# Allegro board 08_037760d.brd
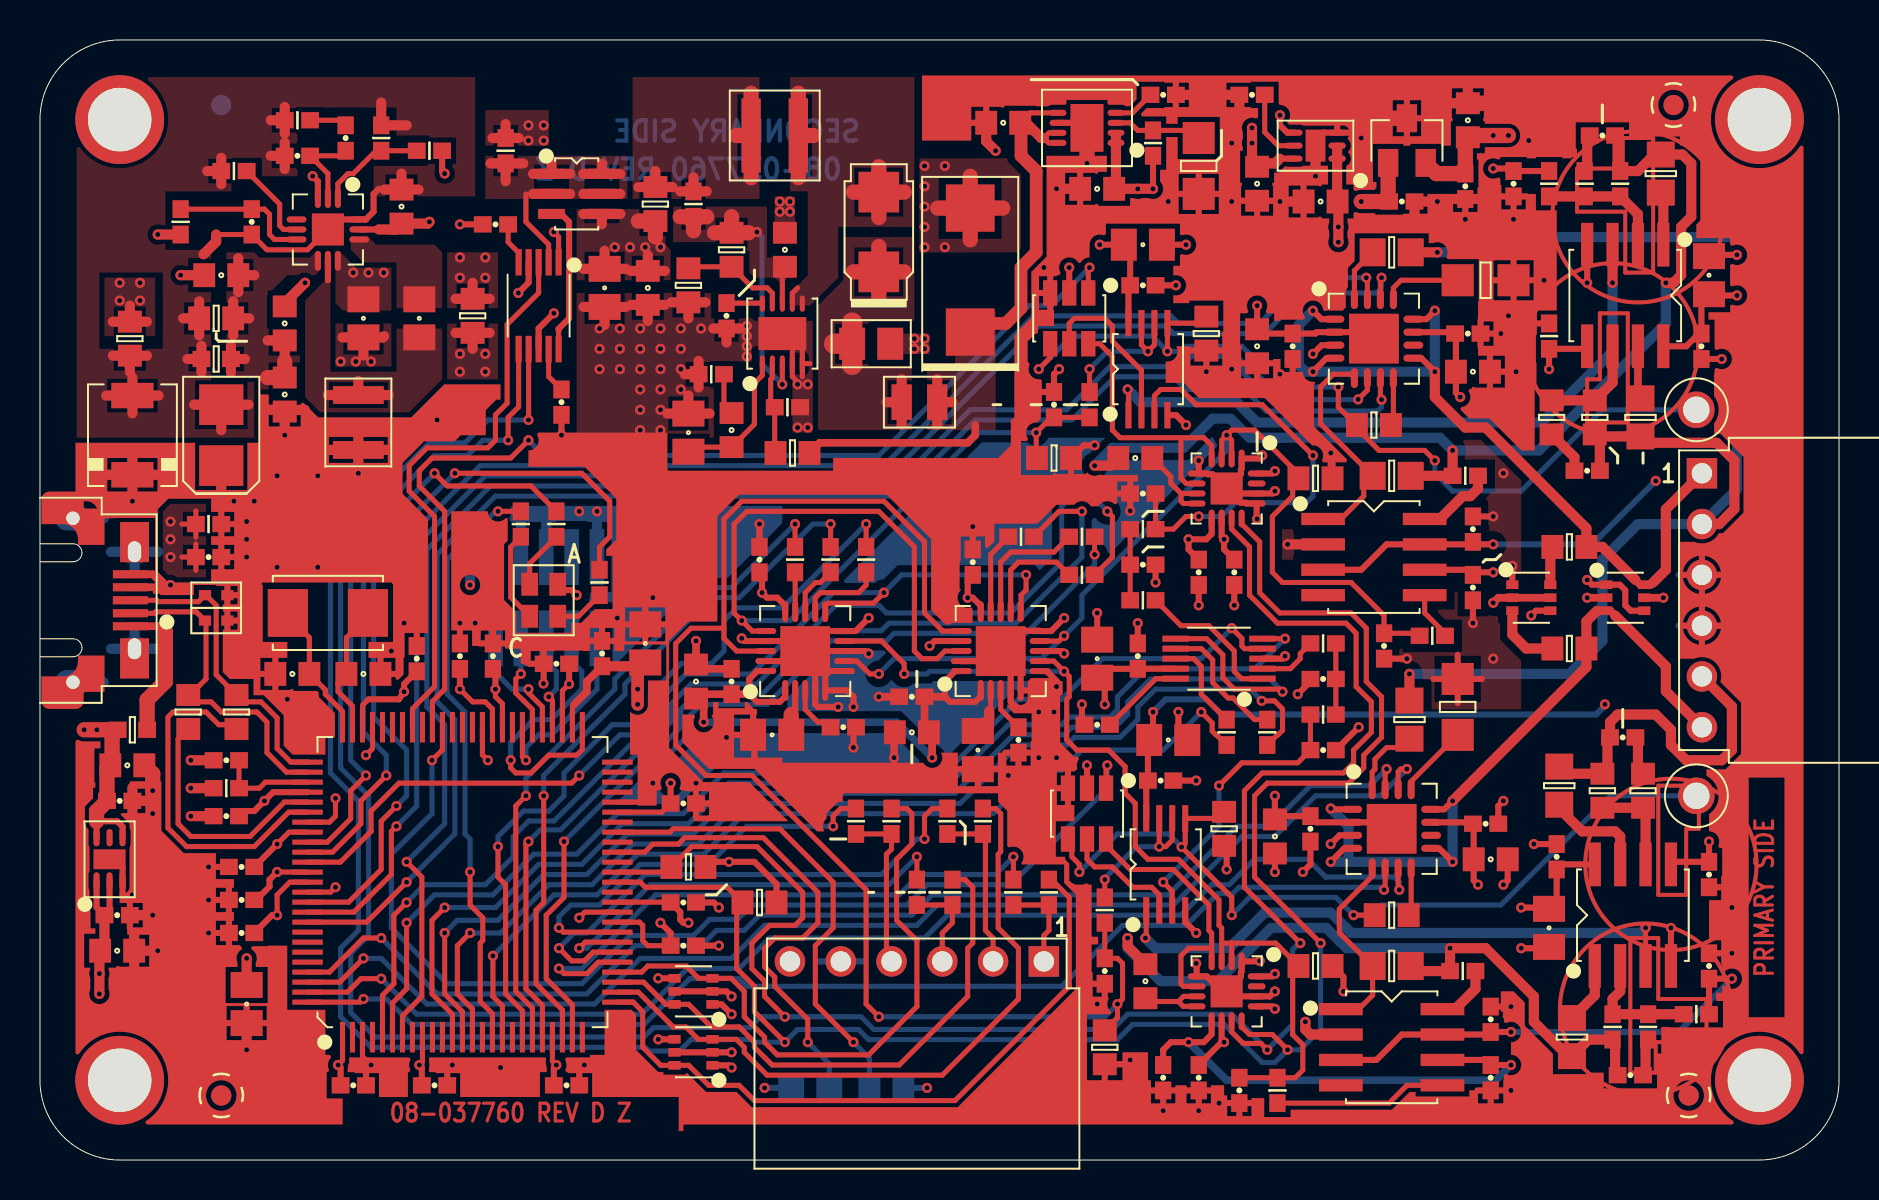
[diagram p0: board, top side]
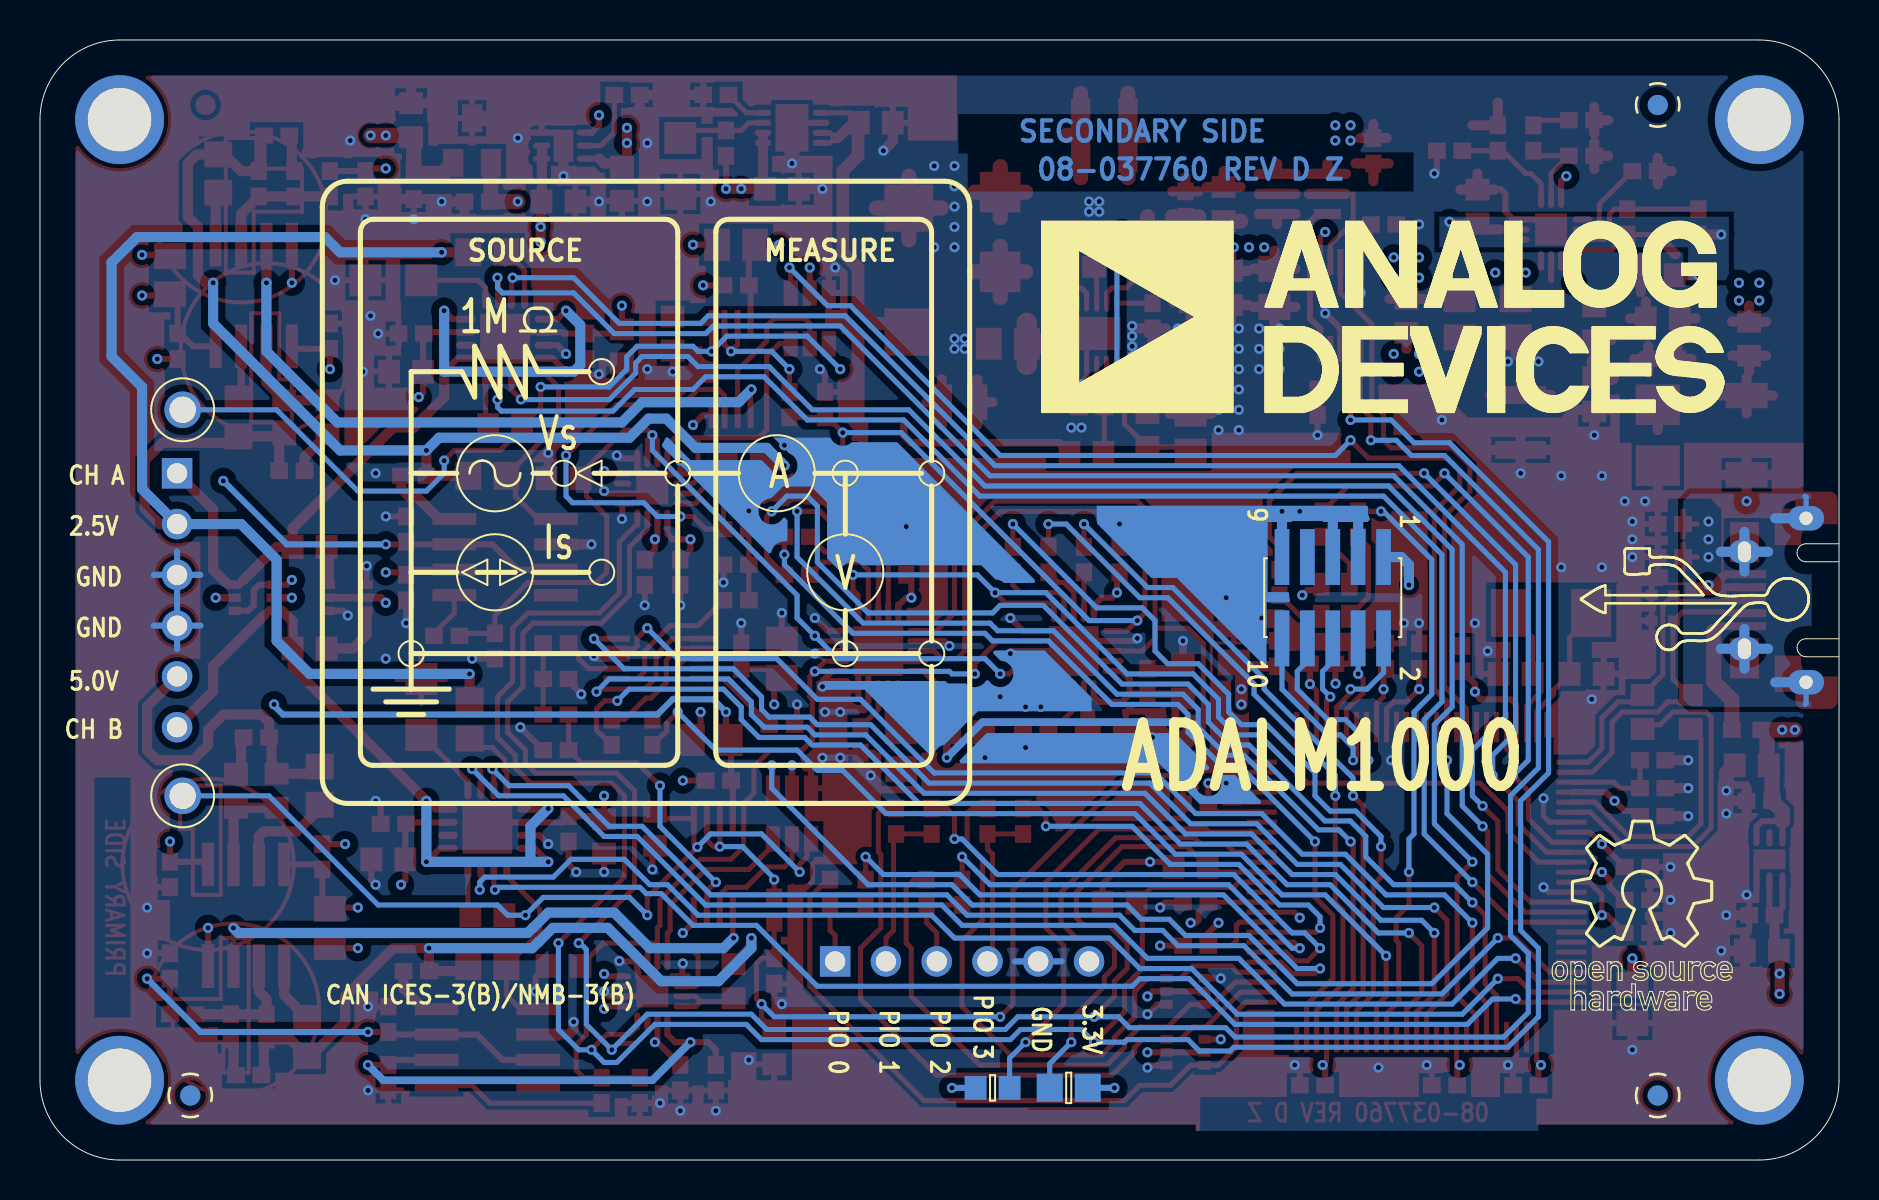
[diagram p1: board, bottom side, seen from below]

Outline 89.99 x 56.01 mm; copper layers: TOP, L2_GND, L3_VDD, BOTTOM. Coordinates in mm from the lower left corner of the outline.
Outline path: 0,52.02 arc(1.17,54.84) 3.99,56.01 86,56.01 arc(88.82,54.84) 89.99,52.02 89.99,3.99 arc(88.82,1.17) 86,0 3.99,0 arc(1.17,1.17) 0,3.99 0,52.02

## Design rules (mm)
net group USB: nets D+ D-
net group USB_A: nets D+_A D-_A
nets with their own width: min track width 0.305; nets 1V8 2V5 3V3 5V0 6V0 -1V0 GND VCC

## Placement (name value [footprint] x y rotation side)
A2  ADG719BRTZ  [SOT23_6]  51.49 42.09 180 top
A3  ADA4661-2ARMZ  [MSOP8]  55.42 39.55 0 top
A4  AD8018ARZ  [SO8]  79.3 43.23 180 top
B2  ADG719BRTZ  [SOT23_6]  52.37 17.32 180 top
B3  ADA4661-2ARMZ  [MSOP8]  56.31 14.78 0 top
B4  AD8018ARZ  [SO8]  79.68 12.24 0 top
C1  10uF  [C0805]  10.34 7.8 270 top
C2  0.1UF  [C0402]  15.67 3.73 180 top
C3  10uF  [C0805]  30.28 25.83 90 top
C4  0.1UF  [C0402]  19.74 3.73 180 top
C5  10pF  [C0402]  9.32 19.99 0 top
C6  12PF  [C0603]  16.18 24.31 0 top
C7  12PF  [C0603]  12.62 24.31 180 top
C8  0.1UF  [C0402]  71.3 48.69 90 top
C9  0.1UF  [C0402]  3.99 17.96 180 top
C10  1UF  [C0603]  71.42 51.99 90 top
C11  100nF  [C0402]  22.78 46.79 0 top
C12  4.7uF  [C0603]  4.37 19.74 0 top
C13  0.1UF  [C0402]  68.12 47.93 180 top
C14  0.1UF  [C0402]  3.86 12.24 180 top
C15  4.7uF  [C0603]  3.86 10.46 0 top
C16  0.01UF  [C0402]  26.09 37.9 90 top
C17  1UF  [C0603]  30.4 43.61 270 top
C18  10uF  [C0805]  28.24 43.61 90 top
C19  0.1UF  [C0402]  26.34 3.73 180 top
C21  0.1UF  [C0402]  46.66 29.9 270 top
C22  1UF  [C0603]  43.61 21.39 180 top
C23  1UF  [C0603]  37.26 45.52 90 top
C24  0.1UF  [C0402]  32.18 10.72 180 top
C25  0.1UF  [C0402]  43.61 23.16 0 top
C26  0.01uF  [C0402]  53.26 9.45 90 top
C27  0.01uF  [C0402]  67.23 25.7 90 top
C28  0.01uF  [C0402]  59.99 3.48 90 top
C30  1uF  [C0805H53]  41.58 40.82 0 top
C32  0.1UF  [C0402]  32.18 12.88 180 top
C33  0.1UF  [C0402]  28.12 25.32 270 top
C34  0.1UF  [C0402]  32.18 17.83 180 top
C35  0.1UF  [C0402]  22.66 25.2 270 top
C36  0.1UF  [C0402]  25.83 24.82 0 top
C37  0.1UF  [C0402]  18.85 25.07 270 top
C38  0.1UF  [C0402]  35.99 30.02 270 top
C39  1000pF  [C0603]  55.3 8.94 90 top
C40  0.1UF  [C0402]  83.49 9.7 270 top
C42  0.01uF  [C0402]  50.72 37.77 270 top
C43  1000pF  [C0603]  54.79 35.1 180 top
C44  0.1UF  [C0402]  73.71 48.82 90 top
C45  220uF  [C7343-31]  46.53 44.5 90 top
C46  0.1UF  [C0402]  71.42 41.33 180 top
C48  0.1UF  [C0402]  21.01 25.2 270 top
C49  0.1UF  [C0402]  71.68 31.55 270 top
C50  0.1UF  [C0402]  10.08 14.66 0 top
C51  0.1UF  [C0402]  9.32 17.2 0 top
C52  0.1UF  [C0402]  10.08 13 0 top
C53  0.1UF  [C0402]  10.08 11.35 0 top
C54  0.1UF  [C0402]  55.17 43.74 180 top
C55  0.1UF  [C0402]  56.18 4.11 270 top
C56  0.1UF  [C0402]  57.96 4.11 90 top
C57  10pF  [C0402]  79.17 21.13 180 top
C58  0.1UF  [C0402]  72.31 16.81 180 top
C59  1UF  [C0603]  32.82 23.93 90 top
C61  0.1UF  [C0402]  34.59 23.93 270 top
C62  1UF  [C0603]  72.57 15.04 0 top
C63  0.1UF  [C0402]  54.91 25.2 270 top
C64  10uF  [C0805]  52.88 25.07 270 top
C65  0.1UF  [C0402]  57.96 29.39 270 top
C66  0.1UF  [C0402]  59.74 29.39 90 top
C67  33pF  [C0402]  78.16 51.23 0 top
C68  1UF  [C0603]  71.68 39.42 0 top
C69  0.1UF  [C0402]  71.68 28.63 270 top
C70  0.1UF  [C0402]  72.57 4.11 270 top
C71  0.1UF  [C0402]  72.57 7.04 270 top
C72  10uF  [C0805]  36.63 21.26 0 top
C73  10uF  [C0805]  46.91 20.5 90 top
C74  0.1UF  [C0402]  40.18 21.64 180 top
C75  0.1UF  [C0402]  48.95 21.01 90 top
C76  10uF  [C0805]  55.17 45.77 0 top
C77  0.1UF  [C0402]  83.11 40.69 90 top
C78  10uF  [C0805]  83.49 44.25 90 top
C79  0.1UF  [C0402]  56.06 18.97 180 top
C80  10uF  [C0805]  56.44 21.01 0 top
C81  0.1UF  [C0402]  75.87 15.16 270 top
C82  10uF  [C0805]  75.49 11.61 270 top
C84  33pF  [C0402]  79.55 4.24 180 top
C85  0.01UF  [C0402]  83.49 14.27 90 top
C90  0.1UF  [C0402]  62.66 40.69 90 top
C91  1UF  [C0603]  60.88 40.69 270 top
C92  0.1UF  [C0402]  63.55 16.56 90 top
C93  1UF  [C0603]  61.77 16.18 270 top
C94  0.01uF  [C0402]  55.17 29.77 180 top
C95  0.01uF  [C0402]  64.19 24.05 0 top
C96  0.01uF  [C0402]  55.17 33.32 0 top
C97  0.01uF  [C0402]  64.19 20.5 180 top
C99  0.1UF  [C0402]  52.88 21.77 0 top
C101  10pF  [C0402]  8.43 30.15 180 top
C102  10pF  [C0402]  77.39 34.47 0 top
C104  4.7uF  [C0603]  48.18 51.87 180 top
C105  0.01UF  [C0402]  56.18 53.26 180 top
C106  4.7uF  [C0603]  52.88 48.56 180 top
C107  2.2uF  [C0603]  60.88 48.82 270 top
C108  2.2uF  [C0603]  64.06 47.93 180 top
C109  0.01UF  [C0402]  34.34 42.21 90 top
C110  0.082UF  [C0603]  34.59 36.5 270 top
C111  10PF  [C0805]  32.44 36.37 270 top
C112  0.01UF  [C0402]  60.63 53.26 0 top
CBST  0.01uF  [C0805]  18.97 42.09 270 top
CC  1UF  [C0603]  12.24 41.83 90 top
CC1  2700pF  [C0402]  15.29 51.1 270 top
CC2  22PF  [C0402]  12.88 50.22 0 top
CIN1  10uF  [C0805]  16.18 42.09 270 top
COUT1  4.7uF  [C0603]  12.24 38.28 90 top
COUT2  47uF  [C3528]  9.07 36.25 90 top
CSS  TBD0402  [C0402]  10.59 46.91 90 top
CVCC  1UF  [C0603]  18.08 47.68 90 top
CVCC2  1UF  [C0603]  9.07 44.25 0 top
D1  B160B-13-F  [DIO214AA]  4.62 36.25 90 top
D2  BAT54SDW-7-F  [SOT363H43]  74.6 28.12 270 top
D3  LTST-C19FD1WT  [LEDSML83W63H26]  25.2 27.99 270 top
D4  B240A-E3/61T  [SMA]  41.96 46.41 90 top
D5  BAT54SDW-7-F  [SOT363H43]  32.69 5.38 90 top
D6  BAT54SDW-7-F  [SOT363H43]  32.69 8.43 90 top
D7  BAT54SDW-7-F  [SOT363H43]  79.3 28.12 270 top
D8  TVSA04V05C006  [D0402]  8.81 26.97 180 top
D9  TVSA04V05C006  [D0402]  8.81 28.24 180 top
E1  330OHM  [L0603]  4.62 21.51 0 top
JTAG  FTSH-105-01-L-DV-TR  [CNHDR2X5H245]  25.32 28.12 0 bottom
L1  2.2uH  [LSML126W90H59]  15.93 36.88 270 top
L2  1uH  [L0603]  8.81 40.06 0 top
L3  4.7uH  [LSMSQ157H122]  36.75 51.23 0 top
L4  110nH  [L9075]  43.99 37.9 0 top
NOREF  -  [unnamed]  86.01 3.99 0 top
NOREF#2  -  [unnamed]  3.99 52.03 0 top
NOREF#3  -  [unnamed#2]  81.71 52.76 0 top
NOREF#4  -  [#2]  111.21 31.5 0 top
NOREF#5  -  [unnamed#2]  82.47 3.23 0 top
NOREF#6  -  [#2]  -139.52 -208.1 0 top
NOREF#7  -  [unnamed#2]  9.07 3.23 0 top
NOREF#8  -  [#2]  2.66 35.99 0 top
NOREF#9  -  [#2]  46.54 70.13 0 top
NOREF#10  -  [#2]  -139.52 -208.1 0 top
NOREF#11  -  [#2]  -139.52 -208.1 0 top
NOREF#12  -  [unnamed]  86.01 52.03 0 top
NOREF#13  -  [#2]  -92.76 141.42 0 top
NOREF#14  -  [#2]  -134.19 -59.81 0 top
NOREF#15  -  [#2]  174.8 62.41 0 top
NOREF#16  -  [#2]  2.21 25.45 0 top
NOREF#17  -  [unnamed]  3.99 3.99 0 top
NOREF#18  -  [#2]  0 30.71 0 top
NOREF#19  -  [unnamed#2]  82.47 3.23 180 bottom
NOREF#20  -  [unnamed#2]  9.07 3.23 180 bottom
NOREF#21  -  [unnamed#2]  9.07 52.76 180 bottom
P1  10103592-0001LF  [CNFCI10103592-0001LF]  1.82 27.99 90 top
P2  PPPC061LGBN-RC  [CNHDRRA1X6H108]  83.13 34.34 270 top
P3  PPPC061LGBN-RC  [CNHDRRA1X6H108]  50.22 9.93 180 top
P4  050/LT/B2  [CNOXLEY50-LT-B2]  82.85 37.52 0 top
P5  050/LT/B2  [CNOXLEY50-LT-B2]  82.85 18.21 0 top
Q1  SI3456DDV-T1-GE3  [TSOP6]  26.85 48.31 270 top
R1  10K  [R0603]  35.99 12.88 180 top
R2  10K  [R0603]  32.44 14.66 180 top
R3  6.8K  [R0402]  9.32 18.59 0 top
R4  33  [R0603]  9.83 22.4 90 top
R5  33  [R0603]  7.42 22.4 90 top
R6  0.1  [R0402]  23.29 50.47 270 top
R7  150  [R0402]  53.26 12.5 90 top
R8  1MEG  [R0603]  59.23 16.56 270 top
R9  750  [R0402]  82.85 7.29 180 top
R10  750  [R0402]  78.66 6.65 270 top
R11  0  [R0603]  34.59 45.52 90 top
R12  50K  [R0603]  32.44 43.74 90 top
R13  0  [R0805]  38.53 3.61 0 bottom
R15  150  [R0402]  69.65 26.21 180 top
R16  150  [R0402]  61.9 3.48 90 top
R18  53.6K  [R0603]  37.64 35.36 0 top
R19  12.7K  [R0402]  37.39 37.64 180 top
R20  150  [R0402]  52.5 37.77 90 top
R21  0  [R0402]  7.04 46.91 270 top
R23  49.9  [R1206]  70.92 22.66 90 top
R24  750  [R0402]  75.49 48.82 270 top
R25  750  [R0402]  79.04 48.82 90 top
R26  100  [R0402]  77.27 48.82 90 top
R27  49.9  [R0805]  67.61 45.39 0 top
R28  49.9  [R1206]  72.31 43.99 0 top
R29  100  [R0603]  66.73 36.75 180 top
R30  0.5  [R0805]  67.61 34.21 180 top
R31  100  [R0603]  67.61 12.24 180 top
R32  0.5  [R0805]  67.61 9.7 180 top
R33  24.9K  [R0603]  78.16 18.47 90 top
R34  100  [R0402]  80.44 6.65 270 top
R35  49.9  [R0805]  68.5 22.02 90 top
R36  0  [R0603]  4.5 41.07 270 top
R37  0  [R0603]  21.64 42.21 270 top
R38  1MEG  [R0603]  58.34 41.33 270 top
R39  24.9K  [R0603]  77.77 37.13 270 top
R41  130  [R0402]  25.83 31.8 90 top
R42  130  [R0402]  27.99 28.88 90 top
R43  130  [R0402]  24.05 31.8 90 top
R45  1  [R0402]  32.69 47.8 90 top
R46  470  [R0402]  48.69 13.39 90 top
R47  470  [R0402]  45.39 16.94 90 top
R48  470  [R0402]  43.87 13.39 90 top
R49  470  [R0402]  40.82 16.94 90 top
R50  220  [R0402]  50.47 13.39 90 top
R51  220  [R0402]  45.64 13.39 90 top
R52  220  [R0402]  47.17 16.94 90 top
R53  220  [R0402]  42.6 16.94 90 top
R54  0  [R0603]  30.78 47.8 90 top
R55  100K  [R0402]  8.43 31.8 180 top
R56  0  [R0603]  42.34 3.61 180 bottom
R57  604  [R0603]  63.8 34.09 180 top
R58  100  [R0603]  80.19 18.47 90 top
R59  604  [R0603]  63.8 9.7 180 top
R60  100  [R0603]  75.62 37.13 270 top
R62  604  [R0603]  50.72 35.1 180 top
R64  2  [R0805]  81.08 49.33 90 top
R65  2  [R0805]  80.06 37.13 270 top
R66  2  [R0805]  76.63 6.15 270 top
R67  2  [R0805]  76 18.72 90 top
R70  10  [R0603]  76.5 30.66 180 top
R71  10  [R0603]  76.5 25.58 180 top
R72  33  [R0402]  61.39 21.39 90 top
R73  33  [R0402]  59.36 21.39 90 top
R74  150  [R0402]  55.17 27.99 180 top
R75  150  [R0402]  64.19 25.83 0 top
R76  150  [R0402]  55.17 31.55 0 top
R77  150  [R0402]  64.19 22.28 180 top
R78  33  [R0402]  41.33 30.02 270 top
R79  33  [R0402]  39.55 30.02 270 top
R80  33  [R0402]  37.77 30.02 90 top
R81  33  [R0402]  52.12 29.26 180 top
R82  33  [R0402]  52.12 31.17 180 top
R83  33  [R0402]  49.07 31.17 0 top
R84  0  [R0402]  71.3 34.21 0 top
R85  0  [R0402]  71.17 9.45 0 top
R95  10.5K  [R0402]  33.58 39.29 0 top
R97  1K  [R0402]  55.68 50.85 270 top
R98  5K  [R1206]  57.96 49.71 90 top
R150  604  [R0603]  53.26 5.64 90 top
R183  510  [R0402]  75.49 41.2 270 top
RC1  11.3K  [R0402]  12.88 51.99 0 top
RF1  23.2K  [R0402]  19.48 50.47 0 top
RF2  34.8K  [R0402]  17.07 51.1 270 top
RFILT  1  [R0603]  8.81 42.09 0 top
RFREQ  88.7K  [R0402]  9.7 49.45 0 top
U1  ATSAM3U1CA-AU  [LQFP100]  21.13 13.89 0 top
U2  ADM1177-1ARMZ  [RM10]  24.94 42.72 180 top
U3  ADP7118ACPZN-5.0  [DFN6_2X2_PAD1_6X1]  3.48 15.04 0 top
U4  ADR381ARTZ  [SOT23]  68.38 50.98 0 top
U5  ADP2442ACPZ  [QFN12_3X3_PAD1_6X1_6]  14.4 46.53 180 top
U6  ADM7171ACPZ  [DFN8_3X3_PAD2_38X1_64]  52.37 51.61 90 top
U7  ADP7118ACPZN-5.0  [DFN6_2X2_PAD1_6X1]  63.8 50.72 90 top
U9  ADP1614ACPZ-1.3  [QFN10_3X3_PAD2_38X1_64]  37.13 41.33 0 top
U10  AD5663RBRMZ  [RM10]  58.98 25.07 90 top
U11  AD7682BCPZ  [QFN20_4X4_PAD2_5X2_5]  38.28 25.45 0 top
U12  AD7682BCPZ  [QFN20_4X4_PAD2_5X2_5]  48.06 25.45 0 top
UA9  AD5122ABCPZ10  [QFN16_3X3_PAD1_6X1_6]  59.36 33.58 180 top
UA11  ADG1611BCPZ  [QFN16_4X4_PAD2_5X2_5]  66.73 41.07 270 top
UA12  AD8210WYRZ  [SO8]  66.73 30.15 270 top
UB9  AD5122ABCPZ10  [QFN16_3X3_PAD1_6X1_6]  59.36 8.43 180 top
UB11  ADG1611BCPZ  [QFN16_4X4_PAD2_5X2_5]  67.61 16.56 270 top
UB12  AD8210WYRZ  [SO8]  67.61 5.64 270 top
Y1  12MEGHz  [YSML197W126H59]  14.4 27.36 180 top

## Library data of the parts
A2 B2 = ADG719BRT: User Part Number: UPN; part number: ADG719BRT_SM-ADG719BRTZ,E005069,SOT23_6
A3 B3 = ADA4661_2_V2: User Part Number: UPN; part number: ADA4661_2_V2_SM-ADA4661-2ARMZ,E019683,MSOP8
A4 B4 = AD8018: User Part Number: UPN; part number: AD8018_SM-AD8018ARZ,E020278,SO8
C1 C3 C18 C64 C72 C73 C76 C78 C80 C82 CIN1 = CAP: Tolerance: 10; User Part Number: UPN; alternate symbols: (C0402H22_ALT,C0201-2,C0402_A,C0402_ALT,C0402L_ALT,C0603L_ALT); part number: CAP_SM-10UF,25V,10,E019080,C0805; tolerance: 10
C2 C4 C8 C9 C13 C14 C19 C21 C24 C25 C32-C38 C40 C44 C46 C48-C56 C58 C61 C63 C65 C66 C69-C71 C74 C75 C77 C79 C81 C90 C92 C99 = CAP: Tolerance: 10; User Part Number: UPN; alternate symbols: (C0402H22_ALT,C0201-2,C0402_A,C0402_ALT,C0402L_ALT,C0603L_ALT); part number: CAP_SM-0.1UF,16V,10,E007200,C0402; tolerance: 10
C5 C57 C101 C102 = CAP: Tolerance: 5; User Part Number: UPN; alternate symbols: (C0402H22_ALT,C0201-2,C0402_A,C0402_ALT,C0402L_ALT,C0603L_ALT); part number: CAP_SM-10PF,50V,5,E007982,C0402; tolerance: 5
C6 C7 = CAP: Tolerance: 5; User Part Number: UPN; alternate symbols: (C0402H22_ALT,C0201-2,C0402_A,C0402_ALT,C0402L_ALT,C0603L_ALT); part number: CAP_SM-12PF,50V,5,E000343,C0603; tolerance: 5
C10 C17 C22 C23 C59 C62 C68 C91 C93 CC CVCC CVCC2 = CAP: Tolerance: 10; User Part Number: UPN; alternate symbols: (C0402H22_ALT,C0201-2,C0402_A,C0402_ALT,C0402L_ALT,C0603L_ALT); part number: CAP_SM-1UF,16V,10,E006882,C0603; tolerance: 10
C11 = CAP: Tolerance: 15; User Part Number: UPN; alternate symbols: (C0402H22_ALT,C0201-2,C0402_A,C0402_ALT,C0402L_ALT,C0603L_ALT); part number: CAP_SM-100NF,10V,15,E007265,C0402; tolerance: 15
C12 C15 C104 C106 COUT1 = CAP: Tolerance: 10; User Part Number: UPN; alternate symbols: (C0402H22_ALT,C0201-2,C0402_A,C0402_ALT,C0402L_ALT,C0603L_ALT); part number: CAP_SM-4.7UF,6.3V,10,E010382,C0603; tolerance: 10
C16 C105 C109 C112 = CAP: Tolerance: 10; User Part Number: UPN; alternate symbols: (C0402H22_ALT,C0201-2,C0402_A,C0402_ALT,C0402L_ALT,C0603L_ALT); part number: CAP_SM-0.01UF,25V,10,E010983,C0402; tolerance: 10
C26-C28 C42 C94-C97 = CAP: Tolerance: 5; User Part Number: UPN; alternate symbols: (C0402H22_ALT,C0201-2,C0402_A,C0402_ALT,C0402L_ALT,C0603L_ALT); part number: CAP_SM-0.01UF,50V,5,E019413,C0402; tolerance: 5
C30 = CAP: Tolerance: 10; User Part Number: UPN; alternate symbols: (C0402H22_ALT,C0201-2,C0402_A,C0402_ALT,C0402L_ALT,C0603L_ALT); part number: CAP_SM-1UF,16V,10,E011046,C0805H53; tolerance: 10
C39 C43 = CAP: Tolerance: 5; User Part Number: UPN; alternate symbols: (C0402H22_ALT,C0201-2,C0402_A,C0402_ALT,C0402L_ALT,C0603L_ALT); part number: CAP_SM-1000PF,50V,5,E007908,C0603; tolerance: 5
C45 = CAPP: Tolerance: 20; User Part Number: UPN; part number: CAPP_SM-220UF,10V,20,E021599,C7343-31; tolerance: 20
C67 C84 = CAP: Tolerance: 5; User Part Number: UPN; alternate symbols: (C0402H22_ALT,C0201-2,C0402_A,C0402_ALT,C0402L_ALT,C0603L_ALT); part number: CAP_SM-33PF,50V,5,E007907,C0402; tolerance: 5
C85 = CAP: Tolerance: 10; User Part Number: UPN; alternate symbols: (C0402H22_ALT,C0201-2,C0402_A,C0402_ALT,C0402L_ALT,C0603L_ALT); part number: CAP_SM-0.01UF,25V,10,E007203,C0402; tolerance: 10
C107 C108 = CAP: Tolerance: 10; User Part Number: UPN; alternate symbols: (C0402H22_ALT,C0201-2,C0402_A,C0402_ALT,C0402L_ALT,C0603L_ALT); part number: CAP_SM-2.2UF,10V,10,E015288,C0603; tolerance: 10
C110 = CAP: Tolerance: 10; User Part Number: UPN; alternate symbols: (C0402H22_ALT,C0201-2,C0402_A,C0402_ALT,C0402L_ALT,C0603L_ALT); part number: CAP_SM-0.082UF,16V,10,E000419,C0603; tolerance: 10
C111 = CAP: Tolerance: 5; User Part Number: UPN; alternate symbols: (C0402H22_ALT,C0201-2,C0402_A,C0402_ALT,C0402L_ALT,C0603L_ALT); part number: CAP_SM-10PF,100V,5,E000242,C0805; tolerance: 5
CBST = CAP: Tolerance: 5; User Part Number: UPN; alternate symbols: (C0402H22_ALT,C0201-2,C0402_A,C0402_ALT,C0402L_ALT,C0603L_ALT); part number: CAP_SM-0.01UF,50V,5,E012401,C0805; tolerance: 5
CC1 = CAP: Tolerance: 5; User Part Number: UPN; alternate symbols: (C0402H22_ALT,C0201-2,C0402_A,C0402_ALT,C0402L_ALT,C0603L_ALT); part number: CAP_SM-2700PF,50V,5,E019944,C0402; tolerance: 5
CC2 = CAP: Tolerance: 5; User Part Number: UPN; alternate symbols: (C0402H22_ALT,C0201-2,C0402_A,C0402_ALT,C0402L_ALT,C0603L_ALT); part number: CAP_SM-22PF,50V,5,E000265,C0402; tolerance: 5
COUT2 = CAPP: User Part Number: UPN; Tolerance: 10; part number: CAPP_SM-47UF,10V,10,E014885,C3528; tolerance: 10
CSS = CAP: User Part Number: UPN; alternate symbols: (C0402H22_ALT,C0201-2,C0402_A,C0402_ALT,C0402L_ALT,C0603L_ALT); part number: CAP_SM-TBD0402,TBD0402,TBD0402,E000381,C0402
D1 = DIOSCHOTTKY: User Part Number: UPN; Tolerance: N/A; alternate symbols: (SOD882L_ALT); part number: DIOSCHOTTKY_SM-B160B-13-F,60V,N/A,E006709,DIO214AA; tolerance: N/A
D2 D5-D7 = DIO6P_V2: User Part Number: UPN; Tolerance: N/A; part number: DIO6P_V2_SM-BAT54SDW-7-F,30V,N/A,E016644,SOT363H43; tolerance: N/A
D3 = DIOLED_4P_V6: User Part Number: UPN; Tolerance: N/A; part number: DIOLED_4P_V6_SM-LTST-C19FD1WT,5V,N/A,E021257,LEDSML83W63H26; tolerance: N/A
D4 = DIOSCHOTTKY: User Part Number: UPN; Tolerance: N/A; alternate symbols: (SOD882L_ALT); part number: DIOSCHOTTKY_SM-B240A-E3/61T,40V,N/A,E019041,SMA; tolerance: N/A
D8 D9 = DIOZNR_V2: Tolerance: N/A; User Part Number: UPN; part number: DIOZNR_V2_SM-TVSA04V05C006,5V,N/A,E015504,D0402; tolerance: N/A
E1 = FERRITE: Tolerance: 25; User Part Number: UPN; alternate symbols: (L1210H59_ALT); part number: FERRITE_SM-330OHM,25,E015984,L0603; tolerance: 25
JTAG = CN10P_ODD_EVEN: User Part Number: UPN; part number: CN10P_ODD_EVEN_SM-FTSH-105-01-L-DV-TR,E019864,CNHDR2X5H245
L1 = IND: User Part Number: UPN; Tolerance: 20; alternate symbols: (L0402-2,L0603_ALT,L1008L_ALT); part number: IND_SM-2.2UH,20,E018625,LSML126W90H59; tolerance: 20
L2 = IND: Tolerance: 20; User Part Number: UPN; alternate symbols: (L0402-2,L0603_ALT,L1008L_ALT); part number: IND_SM-1UH,20,E015929,L0603; tolerance: 20
L3 = IND: User Part Number: UPN; Tolerance: 20; alternate symbols: (L0402-2,L0603_ALT,L1008L_ALT); part number: IND_SM-4.7UH,20,E013623,LSMSQ157H122; tolerance: 20
L4 = IND: Tolerance: 5; User Part Number: UPN; alternate symbols: (L0402-2,L0603_ALT,L1008L_ALT); part number: IND_SM-110NH,5,E016398,L9075; tolerance: 5
P1 = CN5P_4PSHLD: User Part Number: UPN; part number: CN5P_4PSHLD_SM-10103592-0001LF,E021325,CNFCI10103592-0001LF
P2 P3 = CN6P: User Part Number: UPN; part number: CN6P_TH-PPPC061LGBN-RC,E020346,CNHDRRA1X6H108
P4 P5 = CNTP1P: User Part Number: UPN; alternate symbols: (CNBANANA_ALT); part number: CNTP1P_TH-050/LT/B2,E010746,CNOXLEY50-LT-B2
Q1 = TRANSI3460: User Part Number: UPN; part number: TRANSI3460_SM-SI3456DDV-T1-GE3,E016316,TSOP6
R1 R2 = RES: Tolerance: 1; User Part Number: UPN; alternate symbols: (RRAD984L1500W75H520LD32;TO220H590_ALT;R0402_A;R0603_A,R0402_ALT); part number: RES_SM-10K,E003671,1/10W,1,R0603; tolerance: 1
R3 = RES: Tolerance: 1; User Part Number: UPN; alternate symbols: (RRAD984L1500W75H520LD32;TO220H590_ALT;R0402_A;R0603_A,R0402_ALT); part number: RES_SM-6.8K,E011558,1/10W,1,R0402; tolerance: 1
R4 R5 = RES: Tolerance: 1; User Part Number: UPN; alternate symbols: (RRAD984L1500W75H520LD32;TO220H590_ALT;R0402_A;R0603_A,R0402_ALT); part number: RES_SM-33,E004232,1/16W,1,R0603; tolerance: 1
R6 = RES: Tolerance: 1; User Part Number: UPN; alternate symbols: (RRAD984L1500W75H520LD32;TO220H590_ALT;R0402_A;R0603_A,R0402_ALT); part number: RES_SM-0.1,E017078,1/6W,1,R0402; tolerance: 1
R7 R15 R16 R20 R74-R77 = RES: Tolerance: 1; User Part Number: UPN; alternate symbols: (RRAD984L1500W75H520LD32;TO220H590_ALT;R0402_A;R0603_A,R0402_ALT); part number: RES_SM-150,E017444,1/10W,1,R0402; tolerance: 1
R8 R38 = RES: Tolerance: 1; User Part Number: UPN; alternate symbols: (RRAD984L1500W75H520LD32;TO220H590_ALT;R0402_A;R0603_A,R0402_ALT); part number: RES_SM-1MEG,E003682,1/10W,1,R0603; tolerance: 1
R9 R10 R24 R25 = RES: Tolerance: 5; User Part Number: UPN; alternate symbols: (RRAD984L1500W75H520LD32;TO220H590_ALT;R0402_A;R0603_A,R0402_ALT); part number: RES_SM-750,E003445,1/16W,5,R0402; tolerance: 5
R11 R36 R37 R54 R56 = RES: Tolerance: N/A; User Part Number: UPN; alternate symbols: (RRAD984L1500W75H520LD32;TO220H590_ALT;R0402_A;R0603_A,R0402_ALT); part number: RES_SM-0,E005803,N/A,N/A,R0603; tolerance: N/A
R12 = RES: Tolerance: 0.1; User Part Number: UPN; alternate symbols: (RRAD984L1500W75H520LD32;TO220H590_ALT;R0402_A;R0603_A,R0402_ALT); part number: RES_SM-50K,E020895,0.15W,0.1,R0603; tolerance: 0.1
R13 = RES: Tolerance: 1; User Part Number: UPN; alternate symbols: (RRAD984L1500W75H520LD32;TO220H590_ALT;R0402_A;R0603_A,R0402_ALT); part number: RES_SM-0,E004152,1/10W,1,R0805; tolerance: 1
R18 = RES: Tolerance: 0.1; User Part Number: UPN; alternate symbols: (RRAD984L1500W75H520LD32;TO220H590_ALT;R0402_A;R0603_A,R0402_ALT); part number: RES_SM-53.6K,E018889,1/10W,0.1,R0603; tolerance: 0.1
R19 = RES: Tolerance: 1; User Part Number: UPN; alternate symbols: (RRAD984L1500W75H520LD32;TO220H590_ALT;R0402_A;R0603_A,R0402_ALT); part number: RES_SM-12.7K,E019976,1/10W,1,R0402; tolerance: 1
R21 = RES: Tolerance: 1; User Part Number: UPN; alternate symbols: (RRAD984L1500W75H520LD32;TO220H590_ALT;R0402_A;R0603_A,R0402_ALT); part number: RES_SM-0,E010661,1/16W,1,R0402; tolerance: 1
R23 R28 = RES: Tolerance: 1; User Part Number: UPN; alternate symbols: (RRAD984L1500W75H520LD32;TO220H590_ALT;R0402_A;R0603_A,R0402_ALT); part number: RES_SM-49.9,E003114,1/4W,1,R1206; tolerance: 1
R26 R34 = RES: Tolerance: 1; User Part Number: UPN; alternate symbols: (RRAD984L1500W75H520LD32;TO220H590_ALT;R0402_A;R0603_A,R0402_ALT); part number: RES_SM-100,E003760,1/16W,1,R0402; tolerance: 1
R27 R35 = RES: Tolerance: 1; User Part Number: UPN; alternate symbols: (RRAD984L1500W75H520LD32;TO220H590_ALT;R0402_A;R0603_A,R0402_ALT); part number: RES_SM-49.9,E003412,1/8W,1,R0805; tolerance: 1
R29 R31 R58 R60 = RES: Tolerance: 1; User Part Number: UPN; alternate symbols: (RRAD984L1500W75H520LD32;TO220H590_ALT;R0402_A;R0603_A,R0402_ALT); part number: RES_SM-100,E007883,1/16W,1,R0603; tolerance: 1
R30 R32 = RES: Tolerance: 1; User Part Number: UPN; alternate symbols: (RRAD984L1500W75H520LD32;TO220H590_ALT;R0402_A;R0603_A,R0402_ALT); part number: RES_SM-0.5,E017079,1/3W,1,R0805; tolerance: 1
R33 R39 = RES: Tolerance: 0.5; User Part Number: UPN; alternate symbols: (RRAD984L1500W75H520LD32;TO220H590_ALT;R0402_A;R0603_A,R0402_ALT); part number: RES_SM-24.9K,E011717,1/16W,0.5,R0603; tolerance: 0.5
R41-R43 = RES: Tolerance: 1; User Part Number: UPN; alternate symbols: (RRAD984L1500W75H520LD32;TO220H590_ALT;R0402_A;R0603_A,R0402_ALT); part number: RES_SM-130,E003795,1/16W,1,R0402; tolerance: 1
R45 = RES: Tolerance: 5; User Part Number: UPN; alternate symbols: (RRAD984L1500W75H520LD32;TO220H590_ALT;R0402_A;R0603_A,R0402_ALT); part number: RES_SM-1,E019639,1/16W,5,R0402; tolerance: 5
R46-R49 = RES: Tolerance: 1; User Part Number: UPN; alternate symbols: (RRAD984L1500W75H520LD32;TO220H590_ALT;R0402_A;R0603_A,R0402_ALT); part number: RES_SM-470,E014032,1/16W,1,R0402; tolerance: 1
R50-R53 = RES: Tolerance: 1; User Part Number: UPN; alternate symbols: (RRAD984L1500W75H520LD32;TO220H590_ALT;R0402_A;R0603_A,R0402_ALT); part number: RES_SM-220,E011432,1/16W,1,R0402; tolerance: 1
R55 = RES: Tolerance: 5; User Part Number: UPN; alternate symbols: (RRAD984L1500W75H520LD32;TO220H590_ALT;R0402_A;R0603_A,R0402_ALT); part number: RES_SM-100K,E003464,1/10W,5,R0402; tolerance: 5
R57 R59 R62 R150 = RES: Tolerance: 0.1; User Part Number: UPN; alternate symbols: (RRAD984L1500W75H520LD32;TO220H590_ALT;R0402_A;R0603_A,R0402_ALT); part number: RES_SM-604,E010317,1/10W,0.1,R0603; tolerance: 0.1
R64-R67 = RES: Tolerance: 5; User Part Number: UPN; alternate symbols: (RRAD984L1500W75H520LD32;TO220H590_ALT;R0402_A;R0603_A,R0402_ALT); part number: RES_SM-2,E003428,1/8W,5,R0805; tolerance: 5
R70 R71 = RES: Tolerance: 1; User Part Number: UPN; alternate symbols: (RRAD984L1500W75H520LD32;TO220H590_ALT;R0402_A;R0603_A,R0402_ALT); part number: RES_SM-10,E003666,1/10W,1,R0603; tolerance: 1
R72 R73 R78-R83 = RES: Tolerance: 1; User Part Number: UPN; alternate symbols: (RRAD984L1500W75H520LD32;TO220H590_ALT;R0402_A;R0603_A,R0402_ALT); part number: RES_SM-33,E020519,1/10W,1,R0402; tolerance: 1
R84 R85 = RES: Tolerance: 5; User Part Number: UPN; alternate symbols: (RRAD984L1500W75H520LD32;TO220H590_ALT;R0402_A;R0603_A,R0402_ALT); part number: RES_SM-0,E003438,1/16W,5,R0402; tolerance: 5
R95 = RES: Tolerance: 1; User Part Number: UPN; alternate symbols: (RRAD984L1500W75H520LD32;TO220H590_ALT;R0402_A;R0603_A,R0402_ALT); part number: RES_SM-10.5K,E007860,1/16W,1,R0402; tolerance: 1
R97 = RES: Tolerance: 1; User Part Number: UPN; alternate symbols: (RRAD984L1500W75H520LD32;TO220H590_ALT;R0402_A;R0603_A,R0402_ALT); part number: RES_SM-1K,E003763,1/10W,1,R0402; tolerance: 1
R98 = RES: Tolerance: 1; User Part Number: UPN; alternate symbols: (RRAD984L1500W75H520LD32;TO220H590_ALT;R0402_A;R0603_A,R0402_ALT); part number: RES_SM-5K,E015895,1/8W,1,R1206; tolerance: 1
R183 = RES: Tolerance: 1; User Part Number: UPN; alternate symbols: (RRAD984L1500W75H520LD32;TO220H590_ALT;R0402_A;R0603_A,R0402_ALT); part number: RES_SM-510,E015511,1/16W,1,R0402; tolerance: 1
RC1 = RES: Tolerance: 0.1; User Part Number: UPN; alternate symbols: (RRAD984L1500W75H520LD32;TO220H590_ALT;R0402_A;R0603_A,R0402_ALT); part number: RES_SM-11.3K,E019952,1/16W,0.1,R0402; tolerance: 0.1
RF1 = RES: Tolerance: 1; User Part Number: UPN; alternate symbols: (RRAD984L1500W75H520LD32;TO220H590_ALT;R0402_A;R0603_A,R0402_ALT); part number: RES_SM-23.2K,E019517,1/16W,1,R0402; tolerance: 1
RF2 = RES: Tolerance: 1; User Part Number: UPN; alternate symbols: (RRAD984L1500W75H520LD32;TO220H590_ALT;R0402_A;R0603_A,R0402_ALT); part number: RES_SM-34.8K,E020912,1/10W,1,R0402; tolerance: 1
RFILT = RES: User Part Number: UPN; alternate symbols: (RRAD984L1500W75H520LD32;TO220H590_ALT;R0402_A;R0603_A,R0402_ALT); part number: RES_SM-1,E015181,1/10W,1,R0603
RFREQ = RES: Tolerance: 1; User Part Number: UPN; alternate symbols: (RRAD984L1500W75H520LD32;TO220H590_ALT;R0402_A;R0603_A,R0402_ALT); part number: RES_SM-88.7K,E020516,1/10W,1,R0402; tolerance: 1
U1 = ICATSAM3U1CA: User Part Number: UPN; part number: ICATSAM3U1CA_SM-ATSAM3U1CA-AU,E020280,LQFP100
U2 = ADM1177: User Part Number: UPN; part number: ADM1177_SM-ADM1177-1ARMZ,E016506,RM10
U3 U7 = ADP7118: User Part Number: UPN; part number: ADP7118_SM-ADP7118ACPZN-5.0,E021288,DFN6_2X2_PAD1_6X1
U4 = ADR38X: User Part Number: UPN; part number: ADR38X_SM-ADR381ARTZ,E012776,SOT23
U5 = ADP2442: User Part Number: UPN; part number: ADP2442_SM-ADP2442ACPZ,E018413,QFN12_3X3_PAD1_6X1_6
U6 = ADM7171: User Part Number: UPN; part number: ADM7171_SM-ADM7171ACPZ,E021119,DFN8_3X3_PAD2_38X1_64
U9 = ADP1614: User Part Number: UPN; part number: ADP1614_SM-ADP1614ACPZ-1.3,E019029,QFN10_3X3_PAD2_38X1_64
U10 = AD56X3: User Part Number: UPN; part number: AD56X3_SM-AD5663RBRMZ,E018271,RM10
U11 U12 = AD7682: User Part Number: UPN; part number: AD7682_SM-AD7682BCPZ,E007770,QFN20_4X4_PAD2_5X2_5
UA9 UB9 = AD51X2A: User Part Number: UPN; part number: AD51X2A_SM-AD5122ABCPZ10,E020276,QFN16_3X3_PAD1_6X1_6
UA11 UB11 = ADG161X_V2: User Part Number: UPN; part number: ADG161X_V2_SM-ADG1611BCPZ,E018673,QFN16_4X4_PAD2_5X2_5
UA12 UB12 = AD8210: User Part Number: UPN; part number: AD8210_SM-AD8210WYRZ,E012674,SO8
Y1 = XTAL: Tolerance: 30PPM; User Part Number: UPN; part number: XTAL_SM-12MEGHZ,E021373,YSML197W126H59; tolerance: 30PPM

## Footprints (pads in the part's own frame, mm; a bottom-side part is the same pattern mirrored in y, then rotated)
C0402
  rect 0.889x0.813 smd: 1(-0.635,0) 2(0.635,0)
C0603
  rect 1.092x1.194 smd: 1(-0.851,0) 2(0.851,0)
C0805
  rect 1.295x1.6 smd: 1(-0.953,0) 2(0.953,0)
C0805H53
  rect 1.295x1.6 smd: 1(-0.953,0) 2(0.953,0)
C3528
  rect 2.032x2.21 smd: N(1.524,0) P(-1.524,0)
C7343-31
  rect 2.362x2.438 smd: N(3.1,0) P(-3.1,0)
CNFCI10103592-0001LF
  rect 0.406x1.753 smd: 1(-1.3,-2.709) 2(-0.65,-2.709) 3(0,-2.709) 4(0.65,-2.709) 5(1.3,-2.709)
  custom 2.667x3.15 hole 0.711x1.295: 6(-4.1,0.165) 7(4.1,0.165)
  rect 2.007x1.448 hole 1.041x0.66: 8(-2.425,-2.915) 9(2.425,-2.915)
CNHDR2X5H245
  rect 0.737x2.794 smd: 1(-2.54,-2.032) 2(-2.54,2.032) 3(-1.27,-2.032) 4(-1.27,2.032) 5(0,-2.032) 6(0,2.032) 7(1.27,-2.032) 8(1.27,2.032) 9(2.54,-2.032) 10(2.54,2.032)
CNHDRRA1X6H108
  rect 1.524x1.524 hole 1.016: 1(0,0)
  round 1.524 hole 1.016: 2(2.54,0) 3(5.08,0) 4(7.62,0) 5(10.16,0) 6(12.7,0)
CNOXLEY50-LT-B2
  round 1.829 hole 1.321: 1(0,0)
D0402
  rect 0.61x0.508 smd: 1(-0.56,0) 2(0.56,0)
DFN6_2X2_PAD1_6X1
  oval 0.305x0.864 smd: 1(-0.65,-1.082) 2(0,-1.082) 3(0.65,-1.082) 4(0.65,1.082) 5(0,1.082) 6(-0.65,1.082)
  rect 1.6x0.991 smd: PAD(0,0)
DFN8_3X3_PAD2_38X1_64
  oval 0.305x0.838 smd: 1(-0.75,-1.45) 2(-0.25,-1.45) 3(0.25,-1.45) 4(0.75,-1.45) 5(0.75,1.45) 6(0.25,1.45) 7(-0.25,1.45) 8(-0.75,1.45)
  rect 2.388x1.651 smd: PAD(0,0)
DIO214AA
  rect 1.27x2.108 smd: A(1.981,0) C(-1.981,0)
L0603
  rect 0.889x0.813 smd: 1(-0.737,0) 2(0.737,0)
L9075
  rect 1.016x1.778 smd: 1(-0.889,0) 2(0.889,0)
LEDSML83W63H26
  rect 1.143x0.838 smd: 1(-0.8,-0.7) 2(0.8,-0.7) 3(0.8,0.7) 4(-0.8,0.7)
LQFP100
  rect 0.254x1.524 smd: 1(-6,-7.75) 2(-5.5,-7.75) 3(-5,-7.75) 4(-4.5,-7.75) 5(-4,-7.75) 6(-3.5,-7.75) 7(-3,-7.75) 8(-2.5,-7.75) 9(-2,-7.75) 10(-1.5,-7.75) 11(-1,-7.75) 12(-0.5,-7.75) 13(0,-7.75) 14(0.5,-7.75) 15(1,-7.75) 16(1.5,-7.75) 17(2,-7.75) 18(2.5,-7.75) 19(3,-7.75) 20(3.5,-7.75) 21(4,-7.75) 22(4.5,-7.75) 23(5,-7.75) 24(5.5,-7.75) 25(6,-7.75) 51(6,7.75) 52(5.5,7.75) 53(5,7.75) 54(4.5,7.75) 55(4,7.75) 56(3.5,7.75) 57(3,7.75) 58(2.5,7.75) 59(2,7.75) 60(1.5,7.75) 61(1,7.75) 62(0.5,7.75) 63(0,7.75) 64(-0.5,7.75) 65(-1,7.75) 66(-1.5,7.75) 67(-2,7.75) 68(-2.5,7.75) 69(-3,7.75) 70(-3.5,7.75) 71(-4,7.75) 72(-4.5,7.75) 73(-5,7.75) 74(-5.5,7.75) 75(-6,7.75)
  rect 1.524x0.254 smd: 26(7.75,-6) 27(7.75,-5.5) 28(7.75,-5) 29(7.75,-4.5) 30(7.75,-4) 31(7.75,-3.5) 32(7.75,-3) 33(7.75,-2.5) 34(7.75,-2) 35(7.75,-1.5) 36(7.75,-1) 37(7.75,-0.5) 38(7.75,0) 39(7.75,0.5) 40(7.75,1) 41(7.75,1.5) 42(7.75,2) 43(7.75,2.5) 44(7.75,3) 45(7.75,3.5) 46(7.75,4) 47(7.75,4.5) 48(7.75,5) 49(7.75,5.5) 50(7.75,6) 76(-7.75,6) 77(-7.75,5.5) 78(-7.75,5) 79(-7.75,4.5) 80(-7.75,4) 81(-7.75,3.5) 82(-7.75,3) 83(-7.75,2.5) 84(-7.75,2) 85(-7.75,1.5) 86(-7.75,1) 87(-7.75,0.5) 88(-7.75,0) 89(-7.75,-0.5) 90(-7.75,-1) 91(-7.75,-1.5) 92(-7.75,-2) 93(-7.75,-2.5) 94(-7.75,-3) 95(-7.75,-3.5) 96(-7.75,-4) 97(-7.75,-4.5) 98(-7.75,-5) 99(-7.75,-5.5) 100(-7.75,-6)
LSML126W90H59
  rect 0.889x2.54 smd: 1(-1.372,0) 2(1.372,0)
LSMSQ157H122
  rect 0.965x3.708 smd: 1(-1.181,0) 2(1.181,0)
MSOP8
  rect 0.305x1.321 smd: 1(-0.975,-2.3) 2(-0.325,-2.3) 3(0.325,-2.3) 4(0.975,-2.3) 5(0.975,2.3) 6(0.325,2.3) 7(-0.325,2.3) 8(-0.975,2.3)
QFN10_3X3_PAD2_38X1_64
  oval 0.254x0.813 smd: 1(-1,-1.5) 2(-0.5,-1.5) 3(0,-1.5) 4(0.5,-1.5) 5(1,-1.5) 6(1,1.5) 7(0.5,1.5) 8(0,1.5) 9(-0.5,1.5) 10(-1,1.5)
  rect 2.388x1.651 smd: PAD(0,0)
QFN12_3X3_PAD1_6X1_6
  oval 0.305x0.991 smd: 1(-0.5,-1.57) 2(0,-1.57) 3(0.5,-1.57) 7(0.5,1.57) 8(0,1.57) 9(-0.5,1.57)
  oval 0.991x0.305 smd: 4(1.57,-0.5) 5(1.57,0) 6(1.57,0.5) 10(-1.57,0.5) 11(-1.57,0) 12(-1.57,-0.5)
  rect 1.6x1.6 smd: PAD(0,0)
QFN16_3X3_PAD1_6X1_6
  oval 0.305x0.889 smd: 1(-0.75,-1.5) 2(-0.25,-1.5) 3(0.25,-1.5) 4(0.75,-1.5) 9(0.75,1.5) 10(0.25,1.5) 11(-0.25,1.5) 12(-0.75,1.5)
  oval 0.889x0.305 smd: 5(1.5,-0.75) 6(1.5,-0.25) 7(1.5,0.25) 8(1.5,0.75) 13(-1.5,0.75) 14(-1.5,0.25) 15(-1.5,-0.25) 16(-1.5,-0.75)
  rect 1.6x1.6 smd: PAD(0,0)
QFN16_4X4_PAD2_5X2_5
  oval 0.356x0.991 smd: 1(-0.975,-1.974) 2(-0.325,-1.974) 3(0.325,-1.974) 4(0.975,-1.974) 9(0.975,1.974) 10(0.325,1.974) 11(-0.325,1.974) 12(-0.975,1.974)
  oval 0.991x0.356 smd: 5(1.974,-0.975) 6(1.974,-0.325) 7(1.974,0.325) 8(1.974,0.975) 13(-1.974,0.975) 14(-1.974,0.325) 15(-1.974,-0.325) 16(-1.974,-0.975)
  rect 2.489x2.489 smd: PAD(0,0)
QFN20_4X4_PAD2_5X2_5
  oval 0.305x1.041 smd: 1(-1,-1.97) 2(-0.5,-1.97) 3(0,-1.97) 4(0.5,-1.97) 5(1,-1.97) 11(1,1.97) 12(0.5,1.97) 13(0,1.97) 14(-0.5,1.97) 15(-1,1.97)
  oval 1.041x0.305 smd: 6(1.97,-1) 7(1.97,-0.5) 8(1.97,0) 9(1.97,0.5) 10(1.97,1) 16(-1.97,1) 17(-1.97,0.5) 18(-1.97,0) 19(-1.97,-0.5) 20(-1.97,-1)
  rect 2.489x2.489 smd: PAD(0,0)
R0402
  rect 0.889x0.813 smd: 1(-0.635,0) 2(0.635,0)
R0603
  rect 1.092x1.194 smd: 1(-0.851,0) 2(0.851,0)
R0805
  rect 1.295x1.397 smd: 1(-0.953,0) 2(0.953,0)
R1206
  rect 1.6x1.6 smd: 1(-1.397,0) 2(1.397,0)
RM10
  rect 0.305x1.321 smd: 1(-1,-2.171) 2(-0.5,-2.171) 3(0,-2.171) 4(0.5,-2.171) 5(1,-2.171) 6(1,2.171) 7(0.5,2.171) 8(0,2.171) 9(-0.5,2.171) 10(-1,2.171)
SMA
  rect 2.032x2.032 smd: A(1.994,0) C(-1.994,0)
SO8
  rect 0.61x2.184 smd: 1(-1.905,-2.54) 2(-0.635,-2.54) 3(0.635,-2.54) 4(1.905,-2.54) 5(1.905,2.54) 6(0.635,2.54) 7(-0.635,2.54) 8(-1.905,2.54)
SOT23
  rect 1.016x1.397 smd: 1(-0.94,-1.118) 2(0.94,-1.118) 3(0,1.118)
SOT23_6
  rect 0.711x1.27 smd: 1(-0.953,-1.27) 2(0,-1.27) 3(0.953,-1.27) 4(0.953,1.27) 5(0,1.27) 6(-0.953,1.27)
SOT363H43
  rect 0.432x0.61 smd: 1(-0.65,-0.95) 2(0,-0.95) 3(0.65,-0.95) 4(0.65,0.95) 5(0,0.95) 6(-0.65,0.95)
TSOP6
  rect 0.508x1.346 smd: 1(-1.003,-1.257) 2(0,-1.257) 3(1.003,-1.257) 4(1.003,1.257) 5(0,1.257) 6(-1.003,1.257)
unnamed
  round 4.445 hole 3.175 unplated: (0,0)
unnamed#2
  round 1.016 smd: (0,0)
YSML197W126H59
  rect 2.007x2.388 smd: 1(-2.003,0) 2(2.003,0)

## Nets
1V8: C3.1(N1) C4.2(N2) C24.2(N2) C33.2(N2) C35.2(N2) C37.2(N2) C50.2(N2) C52.2(N2) U1.9(VDDCORE_1) U1.34(VDDCORE_2) U1.52(VDDOUT) U1.59(VDDCORE_3) U1.73(VDDPLL) U1.83(VDDCORE_4) U1.87(VDDCORE_5)
2V5: A4.5(NINV) C8.2(N2) C10.1(N1) C40.2(N2) C44.2(N2) C49.2(N2) C71.2(N2) R9.1(N1) R24.1(N1) R183.2(N2) U4.2(VOUT) UA12.3(V_REF2) UA12.7(V_REF1) UB12.3(V_REF2) UB12.7(V_REF1)
3V3: C1.1(N1) C2.2(N2) C14.2(N2) C15.1(N1) C19.2(N2) C21.2(N2) C32.2(N2) C34.2(N2) C36.2(N2) C38.2(N2) C48.2(N2) C51.2(N2) C53.2(N2) C56.2(N2) C66.2(N2) D3.4(A1) D5.2(C1) D5.5(C2) D6.2(C1) D6.5(C2) JTAG.1(N1) P3.6(N6) R1.1(N1) R2.1(N1) R13.1(N1) R56.1(N1) U1.1(VDDANA) U1.22(VDDIO_1) U1.36(VDDIO_2) U1.45(VDDBU) U1.53(VDDIN) U1.60(VDDIO_3) U1.79(VDDUTMI) U1.88(VDDIO_4) U3.1(VOUT) U3.2(SENSE/ADJ) U11.15(VIO) U12.15(VIO) UA9.10(VLOGIC) UA9.16(RESET_N) UB9.10(VLOGIC) UB9.13(ADDR1) UB9.16(RESET_N)
4V5: C17.1(N1) C18.2(N2) Q1.4(S) R37.2(N2) R54.1(N1)
4V5_U5: CC.2(N2) CIN1.1(N1) R37.1(N1) U5.3(EN) U5.9(VIN)
5V0: A2.2(VDD) B2.2(VDD) B4.5(NINV) C13.2(N2) C22.1(N1) C25.2(N2) C55.1(N1) C59.1(N1) C61.2(N2) C63.2(N2) C64.2(N2) C65.1(N1) C69.1(N1) C70.1(N1) C85.2(N2) C108.1(N1) D2.2(C1) D2.5(C2) U4.1(VIN) U7.1(VOUT) U7.2(SENSE/ADJ) U10.9(VDD) U11.1(VDD1) U11.20(VDD2) U12.1(VDD1) U12.20(VDD2) UA9.9(VDD) UA12.6(V_POS) UB9.9(VDD) UB12.6(V_POS)
6V0: A3.8(V+) A4.8(VS+) B3.8(V+) B4.8(VS+) C46.2(N2) C54.2(N2) C58.2(N2) C62.1(N1) C68.1(N1) C76.1(N1) C77.2(N2) C78.1(N1) C79.2(N2) C80.1(N1) C81.2(N2) C82.1(N1) C106.1(N1) C107.1(N1) D7.2(C1) D7.5(C2) R97.2(N2) U6.1(VOUT1) U6.2(VOUT2) U7.4(EN) U7.6(VIN) UA11.11(VDD) UB11.11(VDD)
6V5: C45.P(N1) C104.1(N1) L4.2(N2) R18.2(N2) U6.5(EN) U6.7(VIN2) U6.8(VIN1)
-1V0: A3.4(V-) A4.4(VS-) B3.4(V-) B4.4(VS-) C54.1(N1) C76.2(N2) C77.1(N1) C78.2(N2) C79.1(N1) C80.2(N2) C81.1(N1) C82.2(N2) C90.2(N2) C91.1(N1) C92.2(N2) C93.1(N1) D7.1(A1) D7.4(A2) R36.1(N1) UA11.2(VSS) UA11.PAD UB11.2(VSS) UB11.PAD
-1V0_U5: CC2.1(N1) COUT2.N(N2) CSS.1(N1) CVCC.2(N2) D1.A(P) L2.1(N1) R36.2(N2) RC1.1(N1) RF2.1(N1) RFILT.1(N1) RFREQ.1(N1) U5.12(AGND) U5.PAD
GND: A2.3(GND) B2.3(GND) C1.2(N2) C2.1(N1) C3.2(N2) C4.1(N1) C5.1(N1) C6.2(N2) C7.2(N2) C8.1(N1) C9.1(N1) C10.2(N2) C11.1(N1) C12.2(N2) C13.1(N1) C14.1(N1) C15.2(N2) C16.1(N1) C17.2(N2) C18.1(N1) C19.1(N1) C21.1(N1) C22.2(N2) C23.2(N2) C24.1(N1) C25.1(N1) C26.1(N1) C27.1(N1) C28.1(N1) C30.2(N2) C32.1(N1) C33.1(N1) C34.1(N1) C35.1(N1) C36.1(N1) C37.1(N1) C38.1(N1) C40.1(N1) C42.1(N1) C44.1(N1) C45.N(N2) C46.1(N1) C48.1(N1) C49.1(N1) C50.1(N1) C51.1(N1) C52.1(N1) C53.1(N1) C55.2(N2) C56.1(N1) C58.1(N1) C59.2(N2) C61.1(N1) C62.2(N2) C63.1(N1) C64.1(N1) C65.2(N2) C66.1(N1) C68.2(N2) C69.2(N2) C70.2(N2) C71.1(N1) C72.1(N1) C73.1(N1) C74.1(N1) C75.1(N1) C85.1(N1) C90.1(N1) C91.2(N2) C92.1(N1) C93.2(N2) C94.1(N1) C95.1(N1) C96.1(N1) C97.1(N1) C99.1(N1) C101.1(N1) C104.2(N2) C105.1(N1) C106.2(N2) C107.2(N2) C108.2(N2) C109.1(N1) C111.1(N1) C112.1(N1) CIN1.2(N2) COUT1.1(N1) COUT2.P(N1) D1.C(N) D2.1(A1) D2.4(A2) D5.1(A1) D5.4(A2) D6.1(A1) D6.4(A2) D8.1(N1) D9.1(N1) JTAG.3(N2) JTAG.5(N3) JTAG.9(N5) L1.2(N2) P1.4(N4) P1.5(N5) P2.3(N3) P2.4(N4) P3.5(N5) R3.1(N1) R8.2(N2) R12.1(N1) R19.1(N1) R23.2(N2) R28.2(N2) R38.2(N2) R55.1(N1) R57.1(N1) R59.1(N1) R62.1(N1) R95.1(N1) R98.1(N1) R150.1(N1) R183.1(N1) RF1.2(N2) U1.3(GNDANA) U1.35(GND_1) U1.46(GNDBU) U1.61(GND_2) U1.72(GNDPLL) U1.82(GNDUTMI) U1.89(GND_3) U2.4(GND) U2.8(ADR) U3.3(GND) U3.PAD U4.3(GND) U6.6(GND) U6.PAD(EP) U7.3(GND) U7.PAD U9.4(GND1) U9.5(GND2) U9.PAD U10.3(GND) U11.4(GND1) U11.5(GND2) U11.6(NC6) U11.8(NC8) U11.10(COM) U11.17(NC17) U11.19(NC19) U11.PAD U12.4(GND1) U12.5(GND2) U12.6(NC6) U12.8(NC8) U12.10(COM) U12.17(NC17) U12.19(NC19) U12.PAD UA9.1(GND) UA9.5(VSS) UA9.13(ADDR1) UA9.14(ADDR0) UA9.PAD(EPAD) UA11.3(GND) UA12.2(GND) UB9.1(GND) UB9.5(VSS) UB9.14(ADDR0) UB9.PAD(EPAD) UB11.3(GND) UB12.2(GND)
VCC: CVCC.1(N1) CVCC2.1(N1) R21.2(N2) U5.11(VCC)
CHA: D7.6(AC1) P2.1(N1) R70.1(N1) UA11.1(S1) UA11.4(S4) UA11.9(S3) UA11.12(S2)
CHA_2V5: C102.2(N2) P2.2(N2) R27.2(N2) R35.2(N2) R39.2(N2) R65.2(N2)
CHB: D7.3(AC2) P2.6(N6) R71.1(N1) UB11.1(S1) UB11.4(S4) UB11.9(S3) UB11.12(S2)
CHB_5V: C57.2(N2) P2.5(N5) R33.2(N2) R67.2(N2)
CLR_N: U1.12(PA15/PGMD7) U10.5(CLR_N)
CNV1: U1.86(PA31) U11.11(CNV) U12.11(CNV)
D+: D9.2(N2) P1.3(N3) R4.2(N2) U1.76(DHSDP)
D+_A: R4.1(N1) U1.81(DFSDP)
D-: D8.2(N2) P1.2(N2) R5.2(N2) U1.77(DHSDM)
D-_A: R5.1(N1) U1.80(DFSDM)
FB: R18.1(N1) R19.2(N2) U9.2(FB)
ISENSE-A: C27.2(N2) R15.2(N2) R57.2(N2) U11.7(IN2) U12.9(IN3) UA9.2(A1) UA9.3(W1)
ISENSE-B: C28.2(N2) R16.2(N2) R59.2(N2) U11.9(IN3) U12.7(IN2) UB9.2(A1) UB9.3(W1)
LDAC_N: U1.6(PA30) U10.4(LDAC_N)
NRST: JTAG.10(N5) U1.57(NRST)
PA0: D5.6(AC1) R50.2(N2) U1.26(PA0/PGMNCMD)
PA1: D5.3(AC2) R52.2(N2) U1.27(PA1/PGMRDY)
PA2: D6.6(AC1) R51.2(N2) U1.28(PA2/PGMNOE)
PA3: D6.3(AC2) R53.2(N2) U1.29(PA3/PGMNVALID)
PA4: R46.2(N2) U1.30(PA4/PGMM0)
PA5: R47.2(N2) U1.31(PA5/PGMM1)
PA6: R48.2(N2) U1.32(PA6/PGMM2)
PA7: R49.2(N2) U1.33(PA7/PGMM3)
PA28: R41.2(N2) U1.84(PA28)
PA29: R42.2(N2) U1.85(PA29)
PB15: R43.2(N2) U1.16(PB15)
PWR_ENABLE: U1.68(PB17) U2.3(ON)
RX1: R80.2(N2) U1.20(PA21/PGMD13)
RX2: R83.2(N2) U1.21(PA23/PGMD15)
SCK: R79.2(N2) U11.13(SCK)
SCK0: R72.1(N1) U1.14(PA17/PGMD9)
SCK1: R79.1(N1) U1.23(PA24)
SCK2: R82.1(N1) U1.24(PA25)
SCL: R2.2(N2) U1.39(PA10/PGMD2) U2.6(SCL) UA9.11(SCL) UB9.11(SCL)
SDA: R1.2(N2) U1.38(PA9/PGMD1) U2.7(SDA) UA9.12(SDA) UB9.12(SDA)
SWMODE-A: A2.1(IN) U1.66(PB19)
SWMODE-B: B2.1(IN) U1.65(PB20)
SYNC_N: U1.13(PA16/PGMD8) U10.6(SYNC_N)
TCK: JTAG.4(N2) U1.56(TCK/SWCLK)
TDI: JTAG.8(N4) U1.51(TDI)
TDO: JTAG.6(N3) U1.54(TDO/TRACESWO)
TMS: JTAG.2(N1) U1.55(TMS/SWDIO)
TX0: R73.1(N1) U1.17(PA18/PGMD10)
TX1: R78.1(N1) U1.19(PA20/PGMD12)
TX2: R81.1(N1) U1.5(PA22/PGMD14)
UA11-IN0: U1.90(PB0) UA11.15(IN1)
UA11-IN1: U1.91(PB1) UA11.14(IN2)
UA11-IN2: U1.92(PB2) UA11.7(IN3)
UA11-IN3: U1.7(PB3) UA11.6(IN4)
UB11-IN0: U1.97(PB5) UB11.15(IN1)
UB11-IN1: U1.98(PB6) UB11.14(IN2)
UB11-IN2: U1.99(PB7) UB11.7(IN3)
UB11-IN3: U1.100(PB8) UB11.6(IN4)
UNNAMED_2_ADM1177_I2_GATE: Q1.3(G) U2.10(GATE)
UNNAMED_2_ADM1177_I2_SENSE: Q1.1(D1) Q1.2(D2) Q1.5(D3) Q1.6(D4) R6.2(N2) U2.2(SENSE)
UNNAMED_2_ADM1177_I2_SS: C16.2(N2) U2.9(SS)
UNNAMED_2_ADM1177_I2_TIMER: C11.2(N2) U2.5(TIMER)
UNNAMED_2_ADM7171_I450_SENSE: R97.1(N1) R98.2(N2) U6.3(SENSE)
UNNAMED_2_ADM7171_I450_SS: C105.2(N2) U6.4(SS)
UNNAMED_2_ADP1614_I395_CLRES: R11.1(N1) R12.2(N2) U9.9(CLRES)
UNNAMED_2_ADP1614_I395_COMP: C110.2(N2) C111.2(N2) U9.1(COMP)
UNNAMED_2_ADP1614_I395_SS: C109.2(N2) U9.10(SS)
UNNAMED_2_ADP2442_I24_BST: CBST.1(N1) U5.10(BST)
UNNAMED_2_ADP2442_I24_COMP: CC1.2(N2) CC2.2(N2) U5.2(COMP)
UNNAMED_2_ADP2442_I24_FB: RF1.1(N1) RF2.2(N2) U5.1(FB)
UNNAMED_2_ADP2442_I24_FREQ: RFREQ.2(N2) U5.5(FREQ)
UNNAMED_2_ADP2442_I24_PGND: CC.1(N1) COUT1.2(N2) CVCC2.2(N2) L2.2(N2) RFILT.2(N2) U5.7(PGND)
UNNAMED_2_ADP2442_I24_SW: CBST.2(N2) L1.1(N1) U5.8(SW)
UNNAMED_2_ADP2442_I24_SYNC: CSS.2(N2) R21.1(N1) U5.6(SYNC/MODE)
UNNAMED_2_ADP7118_I458_SS: C112.2(N2) U7.5(SS)
UNNAMED_2_CAP_I106_N1: C6.1(N1) U1.74(XOUT) Y1.1(N1)
UNNAMED_2_CAP_I360_N1: CC1.1(N1) RC1.2(N2)
UNNAMED_2_CAP_I419_N1: C30.1(N1) D4.C(N) L4.1(N1)
UNNAMED_2_CAP_I439_N1: C23.1(N1) R11.2(N2) R45.1(N1) U9.3(EN) U9.8(VIN)
UNNAMED_2_CAP_I486_N1: C110.1(N1) R95.2(N2)
UNNAMED_2_CN5P4PSHLD_I378_GND1: C101.2(N2) P1.6(GND1) P1.7(GND2) P1.8(GND3) P1.9(GND4) R55.2(N2)
UNNAMED_2_CN5P4PSHLD_I378_N1: E1.2(N2) P1.1(N1)
UNNAMED_2_CN6P_I299_N1: P3.1(N1) R46.1(N1) R50.1(N1)
UNNAMED_2_CN6P_I299_N2: P3.2(N2) R47.1(N1) R52.1(N1)
UNNAMED_2_CN6P_I299_N3: P3.3(N3) R48.1(N1) R51.1(N1)
UNNAMED_2_CN6P_I299_N4: P3.4(N4) R49.1(N1) R53.1(N1)
UNNAMED_2_DIOLED4PV6_I314_C1: D3.1(C1) R41.1(N1)
UNNAMED_2_DIOLED4PV6_I314_C2: D3.2(C2) R43.1(N1)
UNNAMED_2_DIOLED4PV6_I314_C3: D3.3(C3) R42.1(N1)
UNNAMED_2_DIOSCHOTTKY_I428_P: D4.A(P) L3.2(N2) U9.6(SW1) U9.7(SW2)
UNNAMED_2_ICATSAM3U1CA_I94_ERAS: R56.2(N2) U1.43(ERASE)
UNNAMED_2_ICATSAM3U1CA_I94_PA12: R13.2(N2) U1.41(PA12/PGMD4)
UNNAMED_2_ICATSAM3U1CA_I94_VBG: C5.2(N2) R3.2(N2) U1.78(VBG)
UNNAMED_2_ICATSAM3U1CA_I94_XIN: C7.1(N1) U1.75(XIN) Y1.2(N2)
UNNAMED_2_RES_I435_N2: L3.1(N1) R45.2(N2) R54.2(N2)
UNNAMED_3_AD51X2A_I23_B1: A2.6(S2) UA9.4(B1) UA9.6(A2)
UNNAMED_3_AD51X2A_I23_B2: C43.1(N1) UA9.7(W2) UA9.8(B2)
UNNAMED_3_AD56X3_I30_DIN: R73.2(N2) U10.8(DIN)
UNNAMED_3_AD56X3_I30_SCLK: R72.2(N2) U10.7(SCLK)
UNNAMED_3_AD56X3_I30_VOUTA: R74.1(N1) U10.1(VOUTA)
UNNAMED_3_AD56X3_I30_VOUTB: R75.1(N1) U10.2(VOUTB)
UNNAMED_3_AD56X3_I30_VREFIN: C99.2(N2) U10.10(VREFIN/VREFOUT)
UNNAMED_3_AD7682_I51_DIN: R78.2(N2) U11.12(DIN)
UNNAMED_3_AD7682_I51_REF: C72.2(N2) U11.2(REF)
UNNAMED_3_AD7682_I51_REFIN: C74.2(N2) U11.3(REFIN)
UNNAMED_3_AD7682_I51_SDO: R80.1(N1) U11.14(SDO)
UNNAMED_3_AD7682_I136_DIN: R81.2(N2) U12.12(DIN)
UNNAMED_3_AD7682_I136_REF: C73.2(N2) U12.2(REF)
UNNAMED_3_AD7682_I136_REFIN: C75.2(N2) U12.3(REFIN)
UNNAMED_3_AD7682_I136_SCK: R82.2(N2) U12.13(SCK)
UNNAMED_3_AD7682_I136_SDO: R83.1(N1) U12.14(SDO)
UNNAMED_3_AD8018_I5_INV: A4.2(INV) R24.2(N2) R25.1(N1) R26.1(N1)
UNNAMED_3_AD8018_I5_NINV: A3.1(OUT) A4.3(NINV)
UNNAMED_3_AD8018_I5_OUT: A4.1(OUT) R64.1(N1)
UNNAMED_3_AD8018_I67_INV: A4.6(INV) R39.1(N1) R60.1(N1)
UNNAMED_3_AD8018_I67_OUT: A4.7(OUT) R65.1(N1)
UNNAMED_3_AD8210_I21_INV: R30.2(N2) UA11.5(D4) UA12.1(INV)
UNNAMED_3_AD8210_I21_NINV: R84.2(N2) UA12.8(NINV)
UNNAMED_3_AD8210_I21_OUT: R15.1(N1) UA12.5(OUT)
UNNAMED_3_ADA46612V2_I229_: A3.6(-IN) A3.7(OUT) R20.2(N2)
UNNAMED_3_ADA46612V2_I229__1: A2.4(S1) A3.5(+IN) P4.1(N1) R29.2(N2) R38.1(N1)
UNNAMED_3_ADA46612V2_I231_: A2.5(D) A3.2(-IN)
UNNAMED_3_ADG161XV2_I178_D1: R27.1(N1) UA11.16(D1)
UNNAMED_3_ADG161XV2_I178_D2: R28.1(N1) UA11.13(D2)
UNNAMED_3_ADG161XV2_I178_D3: R29.1(N1) UA11.8(D3)
UNNAMED_3_CAP_I224_N1: C67.1(N1) R26.2(N2)
UNNAMED_3_CAP_I224_N2: C43.2(N2) C67.2(N2) R25.2(N2) R30.1(N1) R64.2(N2) R84.1(N1)
UNNAMED_3_CAP_I242_N2: C94.2(N2) R74.2(N2) R76.1(N1)
UNNAMED_3_CAP_I243_N2: C95.2(N2) R75.2(N2) R77.1(N1)
UNNAMED_3_CAP_I280_N1: C102.1(N1) R60.2(N2)
UNNAMED_4_AD51X2A_I27_A2: B2.6(S2) UB9.4(B1) UB9.6(A2)
UNNAMED_4_AD51X2A_I27_B2: C39.1(N1) UB9.7(W2) UB9.8(B2)
UNNAMED_4_AD8018_I52_INV: B4.6(INV) R33.1(N1) R58.1(N1)
UNNAMED_4_AD8018_I52_OUT: B4.7(OUT) R67.1(N1)
UNNAMED_4_AD8018_I62_INV: B4.2(INV) R9.2(N2) R10.1(N1) R34.1(N1)
UNNAMED_4_AD8018_I62_NINV: B3.1(OUT) B4.3(NINV)
UNNAMED_4_AD8018_I62_OUT: B4.1(OUT) R66.1(N1)
UNNAMED_4_AD8210_I41_INV: R32.2(N2) UB11.5(D4) UB12.1(INV)
UNNAMED_4_AD8210_I41_NINV: R85.2(N2) UB12.8(NINV)
UNNAMED_4_AD8210_I41_OUT: R16.1(N1) UB12.5(OUT)
UNNAMED_4_ADA46612V2_I136_: B2.5(D) B3.2(-IN)
UNNAMED_4_ADA46612V2_I138_: B3.6(-IN) B3.7(OUT) R7.2(N2)
UNNAMED_4_ADA46612V2_I138__1: B2.4(S1) B3.5(+IN) P5.1(N1) R8.1(N1) R31.2(N2)
UNNAMED_4_ADG161XV2_I97_D1: R35.1(N1) UB11.16(D1)
UNNAMED_4_ADG161XV2_I97_D2: R23.1(N1) UB11.13(D2)
UNNAMED_4_ADG161XV2_I97_D3: R31.1(N1) UB11.8(D3)
UNNAMED_4_CAP_I135_N1: C84.1(N1) R34.2(N2)
UNNAMED_4_CAP_I135_N2: C39.2(N2) C84.2(N2) R10.2(N2) R32.1(N1) R66.2(N2) R85.1(N1)
UNNAMED_4_CAP_I157_N1: C57.1(N1) R58.2(N2)
UNNAMED_4_DIO6PV2_I110_AC1: D2.6(AC1) R70.2(N2)
UNNAMED_4_DIO6PV2_I110_AC2: D2.3(AC2) R71.2(N2)
VSENSE-A: C42.2(N2) R20.1(N1) R62.2(N2) U11.16(IN0) U12.18(IN1)
VSENSE-B: C26.2(N2) R7.1(N1) R150.2(N2) U11.18(IN1) U12.16(IN0)
VSETPOINT-A: A3.3(+IN) C96.2(N2) R76.2(N2)
VSETPOINT-B: B3.3(+IN) C97.2(N2) R77.2(N2)
VUSB: C9.2(N2) C12.1(N1) E1.1(N1) R6.1(N1) U2.1(VCC) U3.4(EN) U3.6(VIN)

Pads without a net: JTAG 7; U1 2 4 8 10 11 15 18 25 37 40 42 44 47 48 49 50 58 62 63 64 67 69 70 71 93 94 95 96; U3 5; U5 4; UA9 15; UA11 10; UA12 4; UB9 15; UB11 10; UB12 4

## Via types
v1: diameter 0.508, hole 0.254, TOP to BOTTOM, 433 vias

## Routing (per net, layer and track width the routed paths; a pad name or vN(x,y) marks a point on that pad's centre or on a via; arc(x,y) is an arc through that point)
1V8: length 30.2
  TOP w0.254: U1.9 19.13,4.91 v1(18.97,4.75) ; v1(11.86,14.4) U1.87 ; 31.55,10.72 30.4,10.72 30.15,10.97 30.15,11.73 29.99,11.89 U1.34 ; U1.73 16.13,22.74 16.43,23.04 ; v1(22.78,23.55) 22.78,23.16 23.13,22.82 U1.59 ; v1(11.86,15.8) 12.46,16.39 U1.83 ; 26.72,22.78 26.63,22.7 U1.52
  TOP w0.305: C37.2 18.21,23.8 v1(18.21,23.42) 17.96,23.04 16.43,23.04 ; C52.2 10.82,13 11.48,13.67 11.48,14.02 v1(11.86,14.4) ; v1(31.04,11.86) 31.55,11.35 31.55,10.72 ; C4.2 19.1,4.62 v1(18.97,4.75) ; C35.2 22.78,24.56 v1(22.78,23.55) ; C50.2 v1(11.86,15.8)
  TOP w0.381: C33.2 27.36,23.93 27.36,23.42 26.72,22.78
  TOP w0.508: C33.2 30.09,24.69
  TOP w0.635: C3.1 29.9,24.5 v1(29.9,23.55) v1(29.9,22.78)
2V5: length 54.7
  TOP w0.305: v1(84.63,9.07) C40.2 R9.1 ; R24.1 C44.2 73.58,49.58 v1(72.69,49.58) ; v1(72.69,30.78) 71.81,30.78 C49.2 71.55,30.78 UA12.7 67.36,30.78 66.09,29.51 64.19,29.51 ; v1(73.58,6.4) 72.57,6.4 72.44,6.27 UB12.7 68.12,6.27 66.85,5 UB12.3 ; A4.5 77.27,40.56 R183.2 v1(75.49,39.55)
  TOP w0.762: U4.2 69.85,49.33 C8.2 71.3,51.02 C10.1 71.51,51.23 v1(72.69,51.23) v1(73.46,51.23)
  BOTTOM w0.305: v1(72.69,30.78) 77.65,30.78 v1(80.82,33.96) ; v1(73.58,6.4) 81.97,6.4 v1(84.63,9.07)
3V3: length 67.9
  TOP w0.254: U1.22 25.63,4.95 v1(25.83,4.75) ; v1(26.47,23.8) 26.13,23.47 U1.53 ; v1(11.86,12.24) 11.86,13.26 12.5,13.89 U1.88 ; U1.1 15.13,4.97 v1(14.91,4.75) ; U1.36 31.44,12.89 31.55,12.88 ; 31.55,17.83 31.11,17.39 U1.45 ; v1(21.01,23.55) 21.64,22.91 22.28,22.91 22.63,22.55 U1.60
  TOP w0.305: R2.1 33.54,14.91 v1(34.47,14.91) 35.74,14.91 36.84,13.8 R1.1 ; 31.55,17.83 v1(31.55,18.85) ; D5.5 D5.2 v1(34.59,5.38) ; UA9.10 59.11,31.16 v1(59.23,31.04) 59.23,30.53 C66.2 ; C2.2 15.04,4.62 v1(14.91,4.75) ; D3.4 26.19,28.5 26.59,28.5 v1(26.85,28.24) ; 31.55,12.88 32.03,12.4 32.03,12.01 32.18,11.86 v1(32.44,11.86) ; U3.2 3.48,12.5 C14.2 2.83,12.64 U3.1 ; U11.15 37.28,27.72 36.88,28.12 36.37,28.12 v1(36.12,28.37) 36.12,29.26 C38.2 ; U1.79 11.66,18.39 v1(11.23,17.96) 10.72,17.45 10.21,17.45 C51.2 ; v1(11.86,12.24) 11.61,12.24 C53.2 ; v1(61.77,7.56) 61.65,7.68 UB9.13 ; C48.2 v1(21.01,23.55) ; UB9.10 59.11,6.02 v1(59.23,5.89) 59.11,5.89 C56.2 ; v1(34.59,8.18) 34.34,8.43 D6.2 D6.5 ; v1(61.77,9.31) 61.65,9.18 UB9.16 ; C36.2 v1(26.47,23.8) ; v1(61.77,34.45) 61.65,34.33 UA9.16 ; U12.15 47.06,27.72 46.66,28.12 v1(46.41,28.12) 46.41,29.01 C21.2 ; v1(25.83,4.75) 25.7,4.62 C19.2
  TOP w0.508: C14.2 3.23,10.68 C15.1 2.97,10.43 v1(2.97,9.32) v1(2.97,8.31) ; C1.1 v1(10.34,10.08)
  BOTTOM w0.305: 43.19,3.61 v1(44.37,3.61) ; R13.1 v1(36.25,3.61)
  BOTTOM w0.508: v1(21.51,28.75) 21.51,29.77 21.89,30.15 JTAG.1
4V5: length 12
  TOP w0.508: 21.64,40.56 R37.2 ; R37.2 22.49,41.36 ; R37.2 20.79,41.36 ; 28.11,46.8 Q1.4 ; Q1.4 29.03,47.31 ; Q1.4 27.18,47.31 ; C17.1 31.26,44.46 ; C17.1 30.4,45.26 ; C17.1 29.55,44.46 ; C18.2 29.3,44.56 ; C18.2 28.24,45.47 ; C18.2 27.19,44.56
  TOP w0.762: 30.78,46.15 R54.1 29.93,46.95
  vias: v1(21.01,40.31) v1(21.01,39.42) v1(22.28,40.31) v1(22.28,39.42) v1(28.75,45.64) v1(29.51,45.64) v1(30.28,45.64) v1(31.04,45.64)
4V5_U5: length 5.3
  TOP w0.305: U5.3 13.9,48.94 v1(13.64,49.2)
  TOP w0.508: v1(13.26,43.87) 12.24,42.85 CC.2 ; 20.79,43.07 R37.1 ; R37.1 22.49,43.07 ; R37.1 21.64,43.87
  vias: v1(15.67,44.37) v1(16.43,44.37) v1(17.2,44.37) v1(21.01,45.14) v1(21.01,44.12) v1(22.28,45.14) v1(22.28,44.12)
5V0: length 82.6
  TOP w0.305: UB9.9 58.61,6.29 58.22,5.89 v1(57.45,5.89) 56.57,5.89 56.18,5.51 C55.1 ; v1(51.49,44.63) A2.2 ; v1(73.58,4.75) C70.1 72.31,5 UB12.6 ; U10.9 54.92,24.57 C63.2 53.33,24.56 C64.2 53.26,23.74 v1(53.26,22.78) ; U12.1 47.06,23.18 46.79,22.91 45.52,22.91 45.26,23.16 45.26,23.93 45.79,24.45 U12.20 ; v1(52.37,19.74) B2.2 ; v1(83.49,15.93) C85.2 81.71,14.91 B4.5 ; 69.27,29.51 71.42,29.51 71.68,29.26 71.81,29.39 v1(72.69,29.39) ; U11.20 35.88,24.45 35.48,24.05 35.48,23.29 35.86,22.91 37.01,22.91 37.28,23.18 U11.1 ; UA9.9 58.61,31.3 58.34,31.04 v1(57.45,31.04) 57.45,30.53 C65.1 ; 64.89,50.54 U7.2
  TOP w0.381: D2.5 D2.2 72.95,28.12 v1(72.69,27.86) ; v1(33.2,21.89) 33.2,22.69 C59.1 33.03,23.29 C61.2 35.48,23.29 ; v1(44.63,20.12) 44.63,21.22 C22.1 44.25,21.6 C25.2 45.26,23.16
  TOP w0.508: v1(64.95,45.9) v1(64.95,46.66) 64.95,47.89 C108.1 64.89,47.95 U7.1 64.89,50.54
  TOP w0.762: v1(66.09,47.93) C13.2 67.44,47.98 U4.1
  BOTTOM w0.381: v1(57.45,5.89) 59.36,3.99 72.82,3.99 v1(73.58,4.75) ; v1(33.2,21.89) 42.85,21.89 v1(44.63,20.12)
6V0: length 69.9
  TOP w0.305: B3.8 55.34,18.89 C79.2 55.42,20.94 C80.1 55.68,21.2 v1(55.68,22.4) ; UA11.11 70.72,41.4 C46.2 70.83,41.29 C68.1 70.83,38.37 v1(71.04,38.15) ; U7.4 62.39,51.37 62.03,51.74 v1(62.03,52.25) ; 77.77,14.78 76.12,14.78 C81.2 75.87,12.94 C82.1 75.43,12.62 v1(74.09,12.62) ; R97.2 v1(55.68,48.56) ; v1(53.01,45.77) C76.1 54.53,45.45 C54.2 54.45,43.65 A3.8 ; U7.6 62.01,50.07 ; UB11.11 71.61,16.89 71.72,16.78 C62.1 71.72,13.98 v1(71.93,13.77) ; v1(84.89,43.23) 83.55,43.23 C78.1 83.11,42.91 C77.2 82.98,41.33 82.35,40.69 A4.8 ; 53.82,51.23 U6.2
  TOP w0.381: D7.5 v1(81.2,28.12) ; D7.2 v1(77.39,28.12)
  TOP w0.508: v1(60.63,51.61) v1(60.63,50.85) 60.63,49.92 C107.1 61.05,49.83 61.77,49.83 62.01,50.07 ; 53.82,51.23 U6.1 53.82,48.66 C106.1 v1(54.91,48.56) v1(55.68,48.56)
  BOTTOM w0.305: v1(78.28,22.78) 78.28,22.72 77.84,22.28 59.11,22.28 58.34,23.04 56.31,23.04 v1(55.68,22.4)
6V5: length 30.4
  TOP w0.254: U6.5 49.53,52.36 C104.1 ; U6.8 50.46,50.86 50.22,51.1 50.47,51.36 U6.7
  TOP w0.381: R18.2 39,35.86 46.41,35.86 46.79,36.25 46.79,36.75
  TOP w0.508: 44.88,36.75 L4.2 ; L4.2 44.88,39.04 ; L4.2 45.64,37.9 ; C104.1 49.33,51.87 50.09,51.1 50.22,51.1
  TOP w0.635: C104.1 49.03,51.78 49.07,51.74 49.07,50.22 49.83,49.45 49.83,45.39 49.07,44.63 49.07,42.6 48.31,41.83 46.97,41.83 C45.P
